# Altium PCB probe_v2.PcbDoc
Units mm, origin at the board's own origin, x right, y up, seen from the top; angles counter-clockwise.
Board outline 16 x 47 mm, 4 copper layers (Top Layer, Internal Plane 1, Internal Plane 2, Bottom Layer), stack 0.758 mm thick; 78 components, 35 nets, 193 pads, 89 vias.
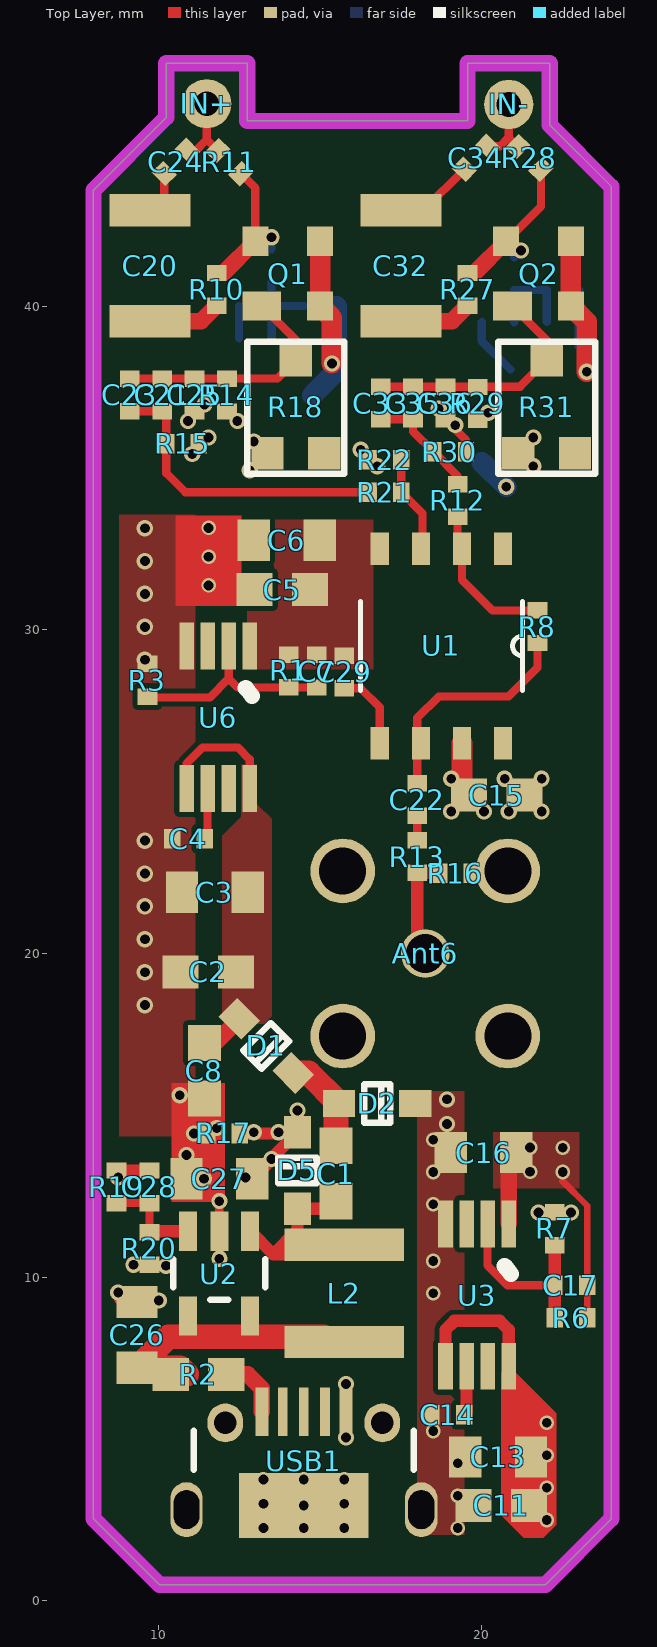
[diagram p0: Top Layer view]
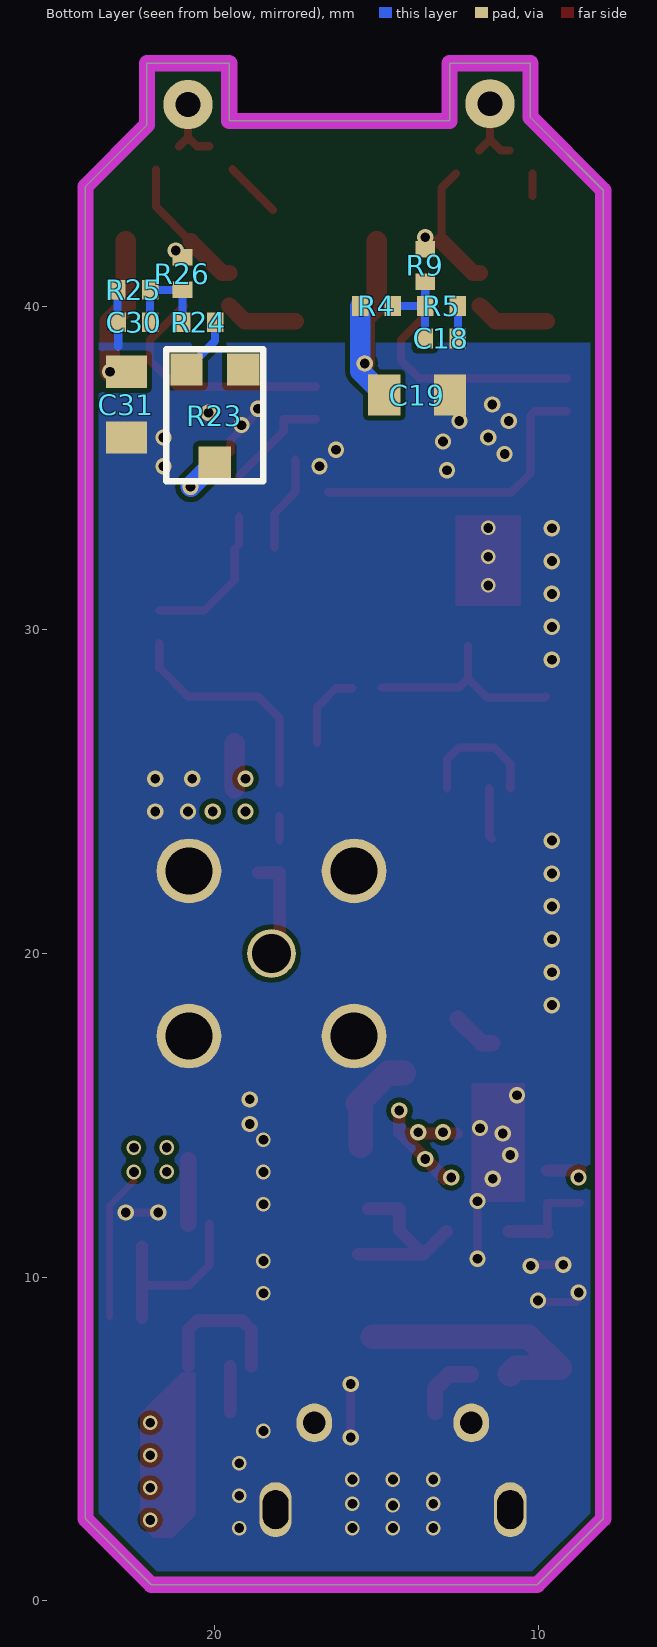
[diagram p1: Bottom Layer view, seen from below]
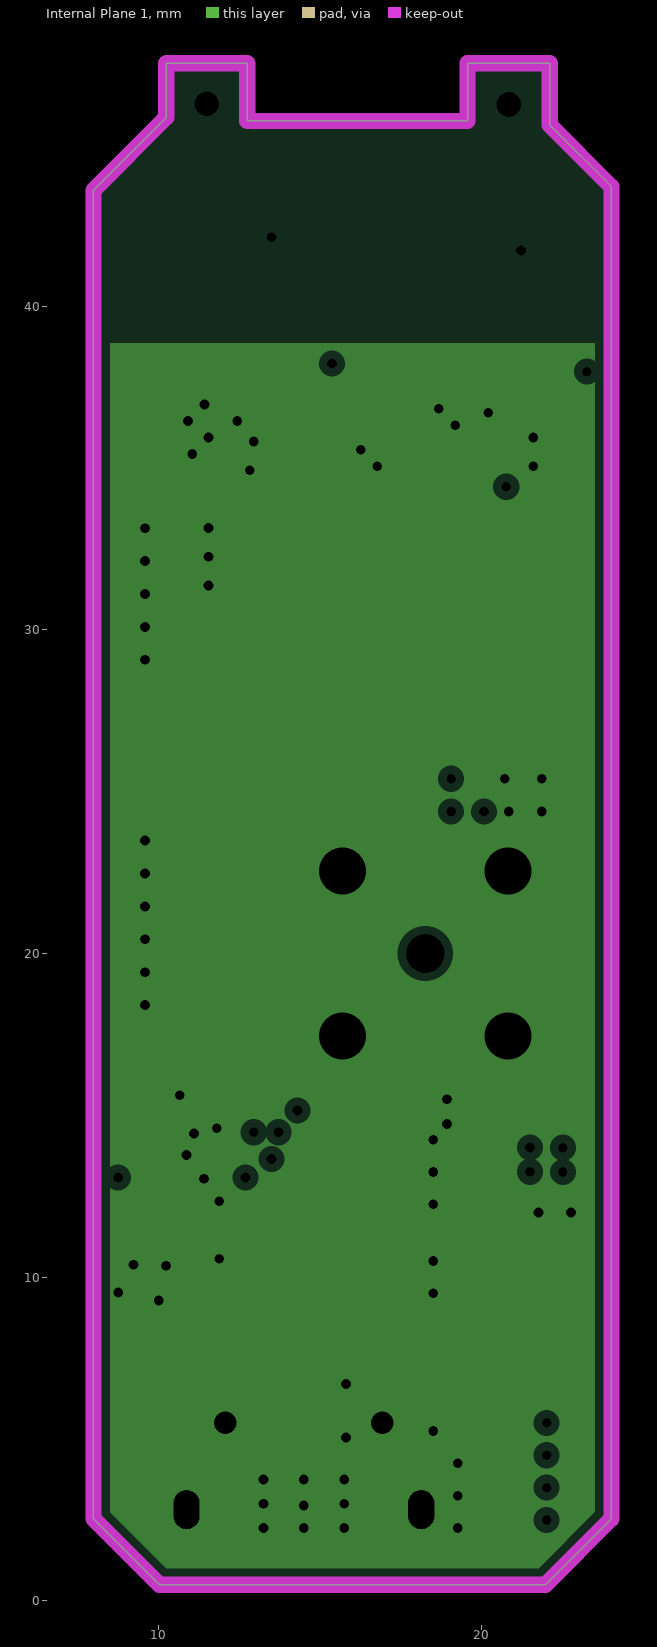
[diagram p2: Internal Plane 1, clearances drawn from the general rule]
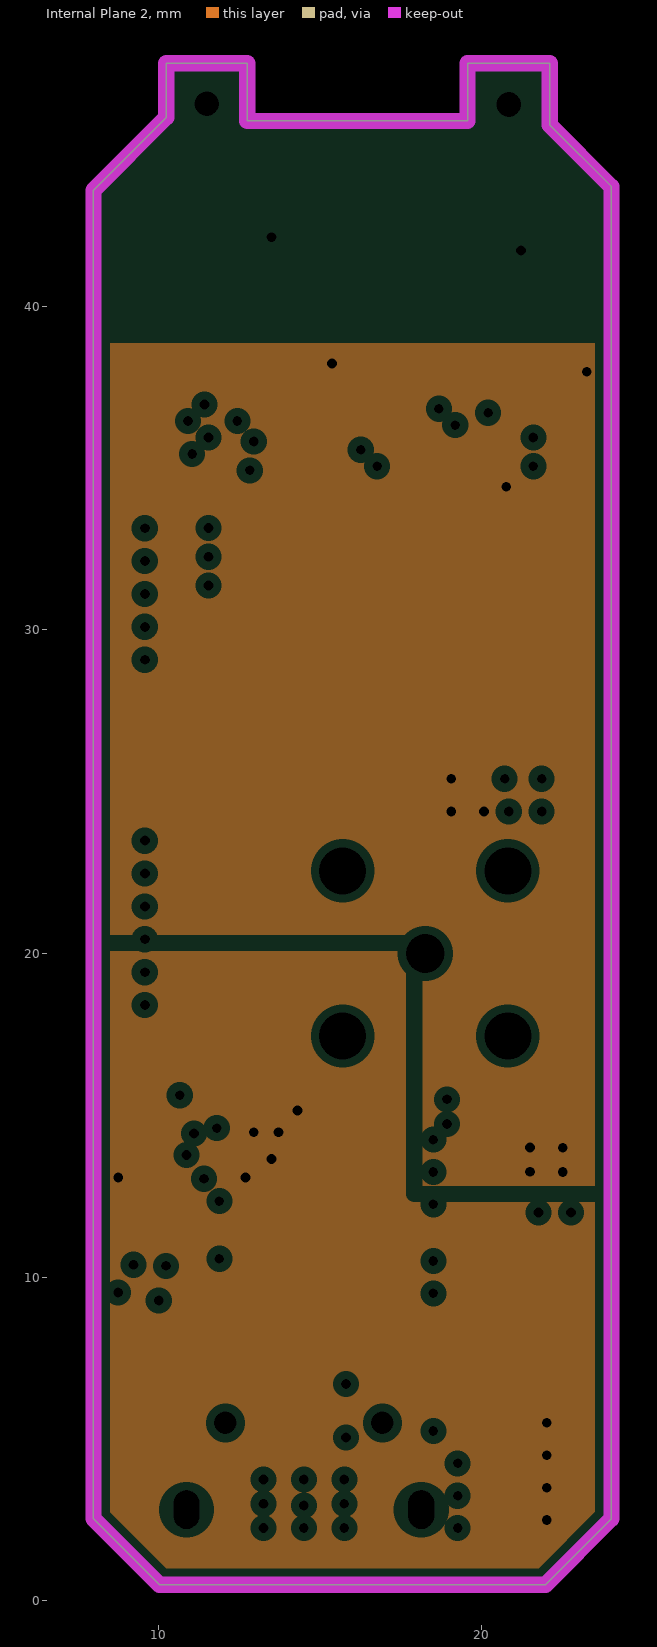
[diagram p3: Internal Plane 2, clearances drawn from the general rule]

## Layer stack, top to bottom
Top Solder: solder mask 0.0102, Solder Resist, Dk 3.8
Top Layer: signal copper 0.0356
Dielectric 1: prepreg 0.1803, Dk 4.6
Internal Plane 1: plane copper 0.036, net GND
Dielectric 3: core 0.254, Dk 4.6
Internal Plane 2: plane copper 0.036, net (Multiple Nets)
Dielectric 4: prepreg 0.1803, Dk 4.6
Bottom Layer: signal copper 0.0356
Bottom Solder: solder mask 0.0102, Solder Resist, Dk 3.8

## Board outline
8,2.541 8,43.577 10.25,45.827 10.25,47.5 12.75,47.5 12.75,45.72 19.558,45.72 19.558,47.5 22.098,47.5 22.098,45.593 24,43.691 24,2.537 21.963,0.5 10.041,0.5

## Design rules (kind name [scope] priority, off if disabled: settings)
Clearance [All] p1: gap=0.152 ignorepadtopadclearanceinfootprint=FALSE except(0: Arc-Hole Track-Hole SMDPad-Hole THPad-Hole Via-Hole Fill-Hole Poly-Hole Region-Hole Text-Hole)
DiffPairsRouting [All] p1: maxlimit=0.254 minlimit=0.254 mostfreqgap=0.254 toplayer_minwidth=0.152 toplayer_maxwidth=0.381 toplayer_prefwidth=0.381 bottomlayer_minwidth=0.152 bottomlayer_maxwidth=0.381 bottomlayer_prefwidth=0.381 maxuncoupledlength=12.7
MinimumSolderMaskSliver [All] p1 off: minsoldermaskwidth=0.254
PlaneClearance [All] p1: clearance=0.254
PlaneConnect [All] p1: planeconnectstyle=Direct reliefexpansion=0.508 reliefentries=4 reliefconductorwidth=0.254 reliefairgap=0.254
PolygonConnect [All] p1: connectstyle=Direct reliefconductorwidth=0.254 reliefentries=4 polygonreliefangle="90 Angle" airgapwidth=0.254
RoomDefinition buffer [InComponentClass('buffer')] p1 off: confinementstyle=ConfineIn formatcopy=TRUE lockcomponents=FALSE outline 25.357,2.096 241.606,2.096 241.606,9.596 25.357,9.596
RoomDefinition power [InComponentClass('power')] p2 off: confinementstyle=ConfineIn formatcopy=TRUE lockcomponents=FALSE outline 51.111,1.852 110.674,1.852 110.674,7.948 51.111,7.948
RoutingVias [All] p1: holewidth=0.3 width=0.5 viastyle="Through Hole" minholewidth=0.3 minwidth=0.5 maxholewidth=0.711 maxwidth=1.27
SilkToBoardRegionClearance [All] p1 off:
SilkToSilkClearance [All] p1 off: silktosilkclearance=0.254
SilkToSolderMaskClearance [IsPad] p1 off: minsilkscreentomaskgap=0.254 clearancetoexposedcopper=TRUE
SolderMaskExpansion [All] p1: expansion=0.102
Width [All] p1: maxlimit=1.524 minlimit=0.152 preferedwidth=0.152
23 further rules are at their usual default settings.

## Classes and differential pairs
component class buffer: Ant6 C18 C19 C20 C21 C22 C23 C24 C25 C29 C30 C31 C32 C33 C34 C35 C36 IN+ IN- Q1 Q2 R4 R5 R8 R9 R10 R11 R12 R13 R14 R15 R16 R18 R21 R22 R23 R24 R25 R26 R27 R28 R29 R30 R31 U1
component class power: C1 C2 C3 C4 C5 C6 C7 C8 C11 C13 C14 C15 C16 C17 C26 C27 C28 D1 D2 D5 L2 R1 R2 R3 R6 R7 R17 R19 R20 U2 U3 U6 USB1

## Components (designator, comment, footprint, x,y, rotation, side; value= is the part's Value field where it differs from the comment)
Ant6 "Antenna" SMA-HOLE 18.25,20 r0 top
C1 "1uF" 0603 15.494,13.208 r270 top
C2 "0.1uF" 0603 11.557,19.431 r180 top
C3 "10uF" 0805 11.75,21.892 r0 top
C4 "10nF" 0402 10.937,23.543 r180 top
C5 "0.1uF" 0603 13.843,31.242 r180 top
C6 "10uF" 0805 13.97,32.766 r0 top
C7 "10nF" 0402 14.9,28.725 r270 top
C8 "0.1uF" 0603 11.43,16.383 r270 top
C11 "0.1uF" 0603 20.6,2.95 r180 top
C13 "10uF" 0805 20.5,4.45 r0 top
C14 "10nF" 0402 18.95,5.75 r180 top
C15 "0.1uF" 0603 20.447,24.892 r0 top
C16 "10uF" 0805 20.05,13.85 r0 top
C17 "10nF" 0402 22.75,9.75 r180 top
C18 "470pf" 0402 13,39 r0 bottom
C19 "470pf" 0805 13.75,37.25 r0 bottom
C20 "TZY2R200AC01R00" TRIM_C 9.75,41.25 r270 top
C21 "470pf" 0402 10.123,37.25 r90 top
C22 "1uF/0R" 0402 18,24.75 r90 top
C23 "470pf" 0402 9.123,37.25 r90 top
C24 "0.6p" 0402 10.541,44.45 r45 top
C25 "470pf" 0402 11.123,37.25 r90 top
C26 "2.2uF" 0805 9.349,8.217 r270 top
C27 "2.2uF" 0805 11.889,13.043 r0 top
C28 "470pf" 0402 9.73,12.789 r90 top
C29 "3.3p" 0402 15.748,28.702 r270 top
C30 "470pf" 0402 22.5,39.5 r180 bottom
C31 "470pf" 0805 22.733,36.957 r90 bottom
C32 "TZY2R200AC01R00" TRIM_C 17.5,41.25 r270 top
C33 "470pf" 0402 16.873,37 r90 top
C34 "0.6p" 0402 19.812,44.577 r45 top
C35 "470pf" 0402 17.873,37 r90 top
C36 "470pf" 0402 18.873,37 r90 top
D1 "Diode 1N4148" LC-SOD-323 13.335,17.145 r135 top
D2 "Diode 1N4148" LC-SOD-323 16.764,15.367 r180 top
D5 "Diode 1N4148" LC-SOD-323 14.302,13.297 r270 top
IN+ "TestPad" TestPad 11.5,46.25 r90 top
IN- "TestPad" TestPad 20.828,46.228 r90 top
L2 "Inductor Iron Dot" L4015 15.75,8 r90 top value=10uH
Q1 "BF998" SOT143 14,42 r0 top
Q2 "BF998" SOT143 21.75,42 r0 top
R1 "17k" 0402 14.036,28.725 r90 top
R2 "FB" 0603 11.25,7 r180 top
R3 "10k" 0402 9.667,28.445 r270 top
R4 "4.7k" 0402 15,40 r0 bottom
R5 "27k" 0402 13,40 r180 bottom
R6 "17k" 0402 22.75,8.75 r0 top
R7 "10k" 0402 22.25,11.5 r270 top
R8 "499R 0.1%" 0402 21.717,30.099 r270 top
R9 "0R" 0402 13.5,41.25 r90 bottom
R10 "200R" 0402 11.811,40.513 r90 top
R11 "0R" 0402 12.192,44.45 r315 top
R12 "499R 0.1%" 0402 19.25,34 r270 top
R13 "50R" 0402 18,23 r270 top
R14 "0R" 0402 12.123,37.25 r270 top
R15 "0R" 0402 10.75,35.75 r0 top
R16 "NC" 0402 19.177,22.479 r0 top
R17 "" 0402 12.016,14.44 r0 top value=10k
R18 "RPot" POT1 14.25,37 r0 top value=1K
R19 "" 0402 8.714,12.789 r90 top value=10k
R20 "" 0402 9.73,10.884 r90 top value=10k
R21 "499R 0.1%" 0402 17,34.25 r0 top
R22 "499R 0.1%" 0402 17,35.25 r0 top
R23 "RPot" POT1 20,36.492 r0 bottom value=1K
R24 "4.7k" 0402 20.5,39.5 r180 bottom
R25 "27k" 0402 22.5,40.5 r0 bottom
R26 "0R" 0402 21,41 r90 bottom
R27 "200R" 0402 19.558,40.513 r90 top
R28 "0R" 0402 21.463,44.577 r315 top
R29 "0R" 0402 19.873,37 r270 top
R30 "0R" 0402 19,35.5 r0 top
R31 "RPot" POT1 22,37 r0 top value=1K
U1 "AD8021" SO8 18.75,29.5 r270 top
U2 "LM27313XMF/NOPB" SOT23-5 11.889,10.122 r180 top value=Value
U3 "tps7a4901" MSOP8/VSSOP8 19.85,9.45 r270 top
U6 "tps7a3001" MSOP8/VSSOP8 11.852,27.302 r270 top
USB1 "USB Micro Type B" MICRO-YZX 14.5,0 r0 top

## Footprints (in the part's own frame and the unit in brackets; to place one, negate y for a bottom-side part, rotate by r counter-clockwise, add the part's x,y. Pads: shape width x height; smd on the part's side, far side on the other; paste and mask are expansions set on the pad)
0402 [mil] "0402-RES"
  rect 20x24 smd: 1(-19.69,0) 2(20,0)
0603 [mil] "0603-RES"
  rect 44x40 smd: 1(-33.46,0) 2(34,0)
0805 [mm]
  rect 1x1.27 smd: 1(-1.016,0) 2(1.016,0)
  body extent -1.27,-0.76 1.27,0.76, height 0.8
L4015 [mm]
  rect 1x3.7 smd: 1(0,0) 2(3,0)
LC-SOD-323 [mm]
  rect 1x0.83 smd: 1(1.18,0) 2(-1.18,0)
  silkscreen extent -0.4,-0.6 0.4,0.6, body extent -1.35,-0.62 1.35,0.63, height 1.1
MICRO-YZX [mm]
  rect 0.4x1.5 smd: 1(-1.3,5.85) 5(1.3,5.85)
  rect 0.3x1.5 smd: 2(-0.65,5.85) 3(0,5.85) 4(0.65,5.85)
  oval 1x1.7 hole 0.8 slot 1.2 at 90 deg: 5(-3.625,2.82) 5(3.625,2.82)
  oval 1.1x1.2 hole 0.7: 5(-2.425,5.5) 5(2.425,5.5)
  rect 4x2 smd: 5(0,2.95)
  silkscreen extent -3.4,4.05 3.4,5.25, body extent -4.02,0.33 3.98,5.93, height 2.6
MSOP8/VSSOP8 [mm]
  rect 1.45x0.45 smd: 1(-2.2,0.975) 2(-2.2,0.325) 3(-2.2,-0.325) 4(-2.2,-0.975) 5(2.2,-0.975) 6(2.2,-0.325) 7(2.2,0.325) 8(2.2,0.975)
  silkscreen extent -0.9,0.85 -0.65,1.05
POT1 [mm]
  rect 1x1 smd: 1(-0.875,-1.55) 2(0.875,-1.55) 3(0,1.325)
  silkscreen extent -1.5,-2.17 1.5,1.9
SMA-HOLE [mm]
  round 1.5 hole 1.2: 1(0,0)
  round 2 hole 1.45: GND(-2.55,-2.55) GND(-2.55,2.55) GND(2.55,-2.55) GND(2.55,2.55)
SO8 [mm]
  rect 1x0.559 smd: 1(-3,1.905) 2(-3,0.635) 3(-3,-0.635) 4(-3,-1.905) 5(3,-1.905) 6(3,-0.635) 7(3,0.635) 8(3,1.905)
  silkscreen extent -1.37,-2.5 1.37,2.5, body extent -3,-2.45 3,2.45, height 1.63
SOT23-5 [mil] "SOT23-5"
  rect 22x48 smd: 1(-37.4,-51.19) 2(0,-51.19) 3(38,-51.19) 4(38,52) 5(-37.4,52)
  silkscreen extent -56,-17 56,32
SOT143 [mm]
  rect 1.2x0.9 smd: 1(-0.8,-2)
  rect 0.8x0.9 smd: 2(1,-2) 3(1,0) 4(-1,0)
TestPad [mil]
  round 60 hole 30: 1(0,0)
TRIM_C [mm]
  rect 1x2.5 smd: 1(-1.715,0) 2(1.715,0)

## Part data
C1 C2 C3 C4 C5 C6 C7 C8 C11 C13 C14 C15 C16 C17: library part Cap, "Capacitor", LatestRevisionDate=17-Jul-2002, LatestRevisionNote="Re-released for DXP Platform.", PackageDescription="Radial Cap, Thru-Hole; 2 Leads; 0.3 in Pin Spacing", PackageReference=RAD-0.3, Published=8-Jun-2000, Publisher="Altium Limited"
C18 C19 C21 C22 C23 C24 C25 C26 C27 C28 C29 C30 C31 C33 C34 C35 C36: library part CAP0402-CAP, "<b>Capacitor</b> / Standard 0603 ceramic capacitor, and 0.1\" leaded capacitor.", PARTNO=CC0402ZRY5V7BB104
C20 C32: library part TRIM_C
D1 D2 D5: "High Conductance Fast Diode", Code_JEDEC=DO-204-AH, ComponentLink1Description="Manufacturer Link", ComponentLink1URL=http://www.fairchildsemi.com/, ComponentLink2Description=Datasheet, ComponentLink2URL=http://www.fairchildsemi.com/ds/1N%2F1N4148.pdf, DatasheetVersion=1997, LatestRevisionDate=17-Jul-2002, LatestRevisionNote="Re-released for DXP Platform.", PackageDescription="Diode, Axial; Body 3.8 x 1.9 mm (LxDia. max), Lead Dia. 0.53 mm (max)", PackageReference=DO-35, Published=8-Jun-2000, Publisher="Altium Limited"
L2: "Magnetic-Core Inductor with Winding Polarity Marking", LatestRevisionDate=17-Jul-2002, LatestRevisionNote="Re-released for DXP Platform.", PackageDescription="Diode; 2 Leads", PackageReference=DIODE_SMC, Published=24-Mar-1999, Publisher="Altium Limited"
R1 R2 R3 R4 R5 R6 R7 R8 R9 R10 R11 R12 R13 R14 R15 R16 R17 R19 R20 R21 R22 R24 R25 R26 R27 R28 R29 R30: library part Res2, "Resistor", LatestRevisionDate=17-Jul-2002, LatestRevisionNote="Re-released for DXP Platform.", PackageDescription="Axial Device, Thru-Hole; 2 Leads; 0.4 in Pin Spacing", PackageReference=AXIAL-0.4, Published=8-Jun-2000, Publisher="Altium Limited"
R18 R23 R31: "Potentiometer", LatestRevisionDate=17-Jul-2002, LatestRevisionNote="Re-released for DXP Platform.", PackageDescription="Variable Resistor, Thru-Hole; 3 Leads", PackageReference=VR5, Published=8-Jun-2000, Publisher="Altium Limited", Set Position=0.5, Sim Note="Enter the Resistance value and the set point into parameter fields."
U2: "Imported", Manufacturer="Texas Instruments", CompType=IC, MountType=SMT, PackageReference=DBV0005A, PartNumber=LM27313XMF/NOPB, PIN_COUNT=5, RefDes=RefDes, RoHS=Y, Type=DEV
U3: library part tps7a3001
USB1: library part USB_Micro_TypeB, "Connector SMD USB Micro Type B middle mount", Manufacturer 1="Molex Inc", Manufacturer Part Number 1=47491-0001, Package / Case=SMD, Supplier Part Number 1=WM17142CT-ND, SCDType=undef, Supplier 1=Digi-Key

## Via types
v1: diameter 0.5, hole 0.3, Top Layer to Bottom Layer, 49 vias
v2: diameter 0.45, hole 0.3, Top Layer to Bottom Layer, 29 vias
v3: diameter 0.508, hole 0.305, Top Layer to Bottom Layer, tented both sides, 11 vias

## Nets (pads, with @x,y where several pads share a name; then routed paths per layer and width w, separated by ;. In a path a pad name is that pad's centre, name@x,y a point inside that pad or via, vN(x,y) a via of type N, cw(c..) or ccw(c..) an arc to the next point about the centre after c; other vN are vias at no path point)
5V: C15.1 C16.2 C17.1 C19.2 C31.2 Q1.2 Q1.3 Q2.2 Q2.3 R4.2 R6.2 R23.3 U1.7 U3.1 | length 20.2
  Top Layer w0.203: 22.486,12.959 22.504,12.959 23.254,12.209 23.254,9.754 C17.1 R6.2@23.25,8.758
  Top Layer w0.508: U3.1 C16.2@20.825,13.609
  Top Layer w0.635: Q1.3 Q1.2 15.367,39.633 v1(15.367,38.227) ; C15.1@19.385,25.104 U1.7 ; Q2.3 Q2.2 23.241,39.509 v1(23.241,37.973)
  Bottom Layer w0.635: C19.2 15.508,37.992 R4.2 ; R23.3 v1(20.75,34.417)
  other v1: 19.05,24.384 20.066,24.384 19.05,25.4
  other v2: 21.488,13.257 22.5,13.25 22.5,14 21.488,14.007
6V: C11.1 C13.2 C27.2 C28.2 D5.2 R17.2 R19.2 U3.5 U3.8 | length 10.9
  Top Layer w0.381: v1(8.763,13.081) 8.763,13.248 R19.2 C28.2 ; R17.2 D5.2@14.265,14.44 ; C27.2 13.5,13.638 v1(13.5,13.65) ; C27.2@12.905,13.08 D5.2@14.265,14.44 ; v1(14.302,15.148) D5.2 D5.2@14.265,14.44 ; U3.5 18.875,8.375 19.15,8.65 20.55,8.65 20.825,8.375 U3.8
  other v1: 12.7,13.081 12.954,14.478 13.716,14.478
  other v2: 22,2.5 22,3.5 22,4.5 22,5.5
-5V: C5.1 C6.2 C7.1 C29.1 R1.2 U1.4 U6.1
BUFF-O1: C21.1 C23.1 R15.1 R21.1 | length 9.5
  Top Layer w0.254: C23.1 C21.1 10.25,36.623 R15.1 10.25,34.835 10.835,34.25 R21.1
BUFF-O2: C33.1 C35.1 R12.1 R30.1 | length 3.3
  Top Layer w0.254: C33.1 C35.1 17.873,36.127 R30.1 R12.1@19.25,34.75
GND: Ant6.GND C2.2 C3.1 C4.2 C5.2 C6.1 C8.2 C11.2 C13.1 C14.2 C15.2 C16.1 C18.1 C19.1 C25.1 C26.1 C27.1 C30.1 C31.1 C36.1 D2.2 R3.1 R5.2 R7.1 R14.2 R15.2 R16.2 R17.1 R18.1 R20.1 R22.1 R25.2 R29.2 R30.2 R31.1 U2.2 U3.4 U6.4 USB1.5 | length 12.6
  Top Layer w0.254: v1(8.763,9.525) 8.763,9.316 8.846,9.233 C26.1 9.966,9.233 v1(10.016,9.283) ; v1(9.237,10.384) R20.1 10.21,10.384 v1(10.244,10.35) ; v1(10.873,13.773) C27.1 v1(11.413,13.043) ; v1(11.109,14.44) R17.1 ; v1(11.889,10.572) U2.2 v1(11.889,12.35) ; v1(15.8,5.05) 15.8,5.85 v1(15.8,6.7) ; C36.1 19.508,35.865 R30.2 ; v1(21.75,12) R7.1 v1(22.75,12)
  Bottom Layer w0.254: C18.1@12.492,39.008 R5.2 ; 22.987,38.752 22.987,39.487 C30.1 ; C30.1@23.008,39.508 R25.2
  other v1: 11.811,14.605 18.923,14.732 18.923,15.494 10.668,15.621 20.828,24.384 21.844,24.384 20.701,25.4 21.844,25.4 12.827,34.925 16.764,35.052 21.59,35.052 11.049,35.433 16.256,35.56 12.954,35.814 11.557,35.941 21.59,35.941 19.177,36.322 10.922,36.449 12.446,36.449 20.193,36.703 18.669,36.83 11.43,36.957
  other v2: 13.25,2.25 14.5,2.25 15.75,2.25 19.25,2.25 14.5,2.95 13.25,3 15.75,3 19.25,3.25 13.25,3.75 14.5,3.75 15.75,3.75 19.25,4.25 18.5,5.25 18.5,9.5 18.5,10.5 18.5,12.25 18.5,13.25 18.5,14.25 11.557,31.369 11.557,32.258 11.557,33.147
  other v3: 9.589,18.406 9.589,19.422 9.589,20.438 9.589,21.454 9.589,22.47 9.589,23.486 9.589,29.074 9.589,30.09 9.589,31.106 9.589,32.122 9.589,33.138
NetAnt6_1: Ant6.1 R13.2 R16.1 | length 2.9
  Top Layer w0.381: Ant6.1@18,20.25 R13.2 R16.1@18.664,22.492
NetC1_1: C1.1 D1.2 D2.1 | length 3
  Top Layer w0.762: D1.2 14.64,16.311 D2.1 ; C1.1 D2.1@15.494,15.277
NetC2_1: C2.1 C3.2 C8.1 D1.1 U6.5 U6.8 | length 5.3
  Top Layer w0.254: U6.5 10.877,25.87 11.369,26.362 12.461,26.362 12.827,25.997 U6.8
  Top Layer w0.508: C8.1 11.754,17.233 D1.1
NetC4_1: C4.1 U6.6 | length 1.6
  Top Layer w0.254: C4.1 11.527,23.632 U6.6
NetC7_2: C7.2 R1.1 R3.2 U6.2 | length 6.5
  Top Layer w0.254: R3.2@9.769,27.937 9.794,27.912 11.598,27.912 12.177,28.491 ; U6.2 12.177,28.491 ; C7.2@14.843,28.213 13.962,28.213 12.454,28.213 12.177,28.491
NetC14_1: C14.1 U3.6 | length 1.4
  Top Layer w0.381: C14.1@19.525,5.825 U3.6
NetC17_2: C17.2 R6.1 R7.2 U3.2 | length 5.8
  Top Layer w0.254: U3.2 20.175,10.367 20.792,9.75 C17.2
  Top Layer w0.381: R6.1 R7.2@22.25,10.942
NetC18_2: C18.2 R4.1 R5.1 R9.1 | length 2.8
  Bottom Layer w0.254: R9.1 R5.1 ; C18.2 13.508,39.992 R5.1 ; R4.1 R5.1
NetC20_1: C20.1 C24.1 | length 0.7
  Top Layer w0.254: C20.1@10.187,43.402 C24.1
NetC20_2: C20.2 R10.1 | length 2.3
  Top Layer w0.508: C20.2 11.333,39.535 R10.1
NetC21_2: C21.2 C23.2 C25.2 Q1.1 R14.1 R18.3 | length 7.5
  Top Layer w0.254: C23.2 C21.2 C25.2 13.683,37.758 R18.3 14.25,38.95 Q1.1
NetC22_1: C22.1 R13.1 | length 0.8
  Top Layer w0.254: R13.1 C22.1
NetC22_2: C22.2 R8.2 U1.6 | length 7.1
  Top Layer w0.254: C22.2 18,27.271 18.669,27.94 20.828,27.94 21.717,28.829 R8.2
NetC24_2: C24.2 IN+.1 R11.1 | length 2.3
  Top Layer w0.254: C24.2 11.167,44.809 11.5,45.142 ; IN+.1 11.5,45.142 ; R11.1 11.5,45.142
NetC28_1: C28.1 R19.1 R20.2 U2.3 | length 3.1
  Top Layer w0.254: R19.1 C28.1 R20.2
  Top Layer w0.381: R20.2 9.76,11.422 U2.3
NetC29_2: C29.2 U1.5 | length 2.4
  Top Layer w0.254: C29.2 16.256,28.194 16.845,27.605 U1.5
NetC30_2: C30.2 R24.1 R25.1 R26.1 | length 3
  Bottom Layer w0.254: R24.1 R26.1 R25.1 C30.2@22,39.508
NetC32_1: C32.1 C34.1 | length 1.8
  Top Layer w0.254: C32.1@18.2,42.965 C34.1
NetC32_2: C32.2 R27.1 | length 2.3
  Top Layer w0.508: C32.2 19.08,39.535 R27.1
NetC33_2: C33.2 C35.2 C36.2 Q2.1 R29.1 R31.3 | length 7.6
  Top Layer w0.254: C33.2 C35.2 C36.2 21.183,37.508 R31.3 22,38.95 Q2.1
NetC34_2: C34.2 IN-.1 R28.1 | length 2.2
  Top Layer w0.254: C34.2 20.552,44.936 20.828,45.212 ; IN-.1 20.828,45.212 ; R28.1 20.828,45.212
NetQ1_4: Q1.4 R9.2 R10.2 R11.2 | length 4.2
  Top Layer w0.254: R11.2 13,43.642 Q1.4
  Top Layer w0.508: R10.2 12.021,41.021 Q1.4
  Bottom Layer w0.254: R9.2 v1(13.5,42.126)
NetQ2_4: Q2.4 R26.2 R27.2 R28.2 | length 4.6
  Top Layer w0.254: Q2.4 21.822,43.072 R28.2
  Top Layer w0.508: R27.2 19.771,41.021 Q2.4
  Bottom Layer w0.254: R26.2 v1(21.209,41.717)
NetR2_1: R2.1 USB1.1 | length 2
  Top Layer w0.508: R2.1 12.761,7 13.2,6.561 USB1.1
NetR8_1: R8.1 R12.2 U1.2 | length 4.5
  Top Layer w0.254: U1.2@19.25,32.635 R12.2 ; U1.2 19.385,31.542 20.328,30.599 R8.1
NetR21_2: R21.2 R22.2 U1.3 | length 3
  Top Layer w0.254: R22.2 R21.2 18.161,33.597 U1.3@18.161,32.546
NetR23_2: R23.2 R24.2 | length 1.8
  Bottom Layer w0.254: R24.2 19.992,38.925 R23.2
SW: C1.2 D5.1 L2.2 U2.1 | length 5.7
  Top Layer w0.381: U2.1 13.552,10.709 ; C1.2@15.267,12.117 D5.1 14.302,11.459 13.552,10.709 ; L2.2@15.572,10.709 13.552,10.709
VSYS: C26.2 L2.1 R2.2 U2.4 U2.5 | length 7.8
  Top Layer w0.762: R2.2@10.886,7 10.685,7.201 C26.2 10.313,8.165 L2.1@15.116,8.165
pads on no net: R18.2 R23.1 R31.2 U1.1 U1.8 U3.3 U3.7 U6.3 U6.7 USB1.2 USB1.3 USB1.4

## Polygon pours and split planes (outlines as drawn)
5V on Top Layer "5V_L01_P038" (solid, remove dead copper, pour order 38): 20.35,14.478 20.35,12.75 23,12.75 23,14.478
GND on Top Layer "GND_L01_P036" (solid, remove dead copper, pour order 36): 18,2.05 19.45,2.05 19.45,15.748 18,15.748
GND on Top Layer "Bottom Layer-No Net" (solid, remove dead copper, pour order 32): 8.804,14.351 8.804,33.551 11.141,33.551 11.141,14.351
-5V on Top Layer "Bottom Layer-No Net" (solid, remove dead copper, pour order 20): 12.75,28.775 12.75,33.401 16.637,33.401 16.637,28.775
NetC2_1 on Top Layer "Bottom Layer-No Net" (solid, remove dead copper, pour order 18): 12.563,25.829 12.563,24.229 11.979,23.645 11.979,18.031 12.182,17.828 13.173,17.828 13.274,17.828 13.5,18.054 13.5,24.155 13.071,24.584 13.046,24.61 13.046,25.829
GND on Bottom Layer "Bottom Layer-No Net" (solid, remove dead copper, pour order 34): 7.991,38.862 24,38.862 24,0.5 8,0.5
6V on Internal Plane 2 (split plane): 17.655,12.573 17.663,12.508 17.689,12.447 17.729,12.395 17.781,12.355 17.842,12.329 17.907,12.321 23.49,12.321 23.49,2.748 21.752,1.01 10.252,1.01 8.51,2.752 8.51,20.068 17.655,20.068
5V on Internal Plane 2 (split plane): 23.49,12.825 18.159,12.825 18.159,20.32 18.151,20.385 18.125,20.446 18.085,20.498 18.033,20.538 17.972,20.564 17.907,20.572 8.51,20.572 8.51,38.862 23.49,38.862
GND on Internal Plane 1 (split plane): 23.49,2.748 21.752,1.01 10.252,1.01 8.51,2.752 8.51,38.862 23.49,38.862

## Keep-outs
Keep-Out Layer:
  the board outline again, w0.5

## Other copper
Top Layer:
  rectangle net GND: 10.414,12.319 12.065,16.002
  rectangle net GND: 10.541,30.734 12.573,33.528
  region net 6V: 20.599,7.05 20.599,2.651 21.3,1.95 21.9,1.95 22.3,2.35 22.3,5.792 21.042,7.05
Internal Plane 1 (plane layer: these items are gaps in the copper):
  rectangle: 8,38.862 24,47.6
Internal Plane 2 (plane layer: these items are gaps in the copper):
  rectangle: 8,38.862 24,47.6
  lines w0.5: 7.747,20.32 8.636,20.32 17.907,20.32 17.907,12.573 24.003,12.573